# Altium PCB Nucleo Shield.PcbDoc
Units mil, origin at the board's own origin, x right, y up, seen from the top; angles counter-clockwise.
Board outline 6000 x 4000 mil, 2 copper layers (Top Layer, Bottom Layer); 70 components, 61 nets, 296 pads, 0 vias.
Unrouted connection lines stored in the file: 175.
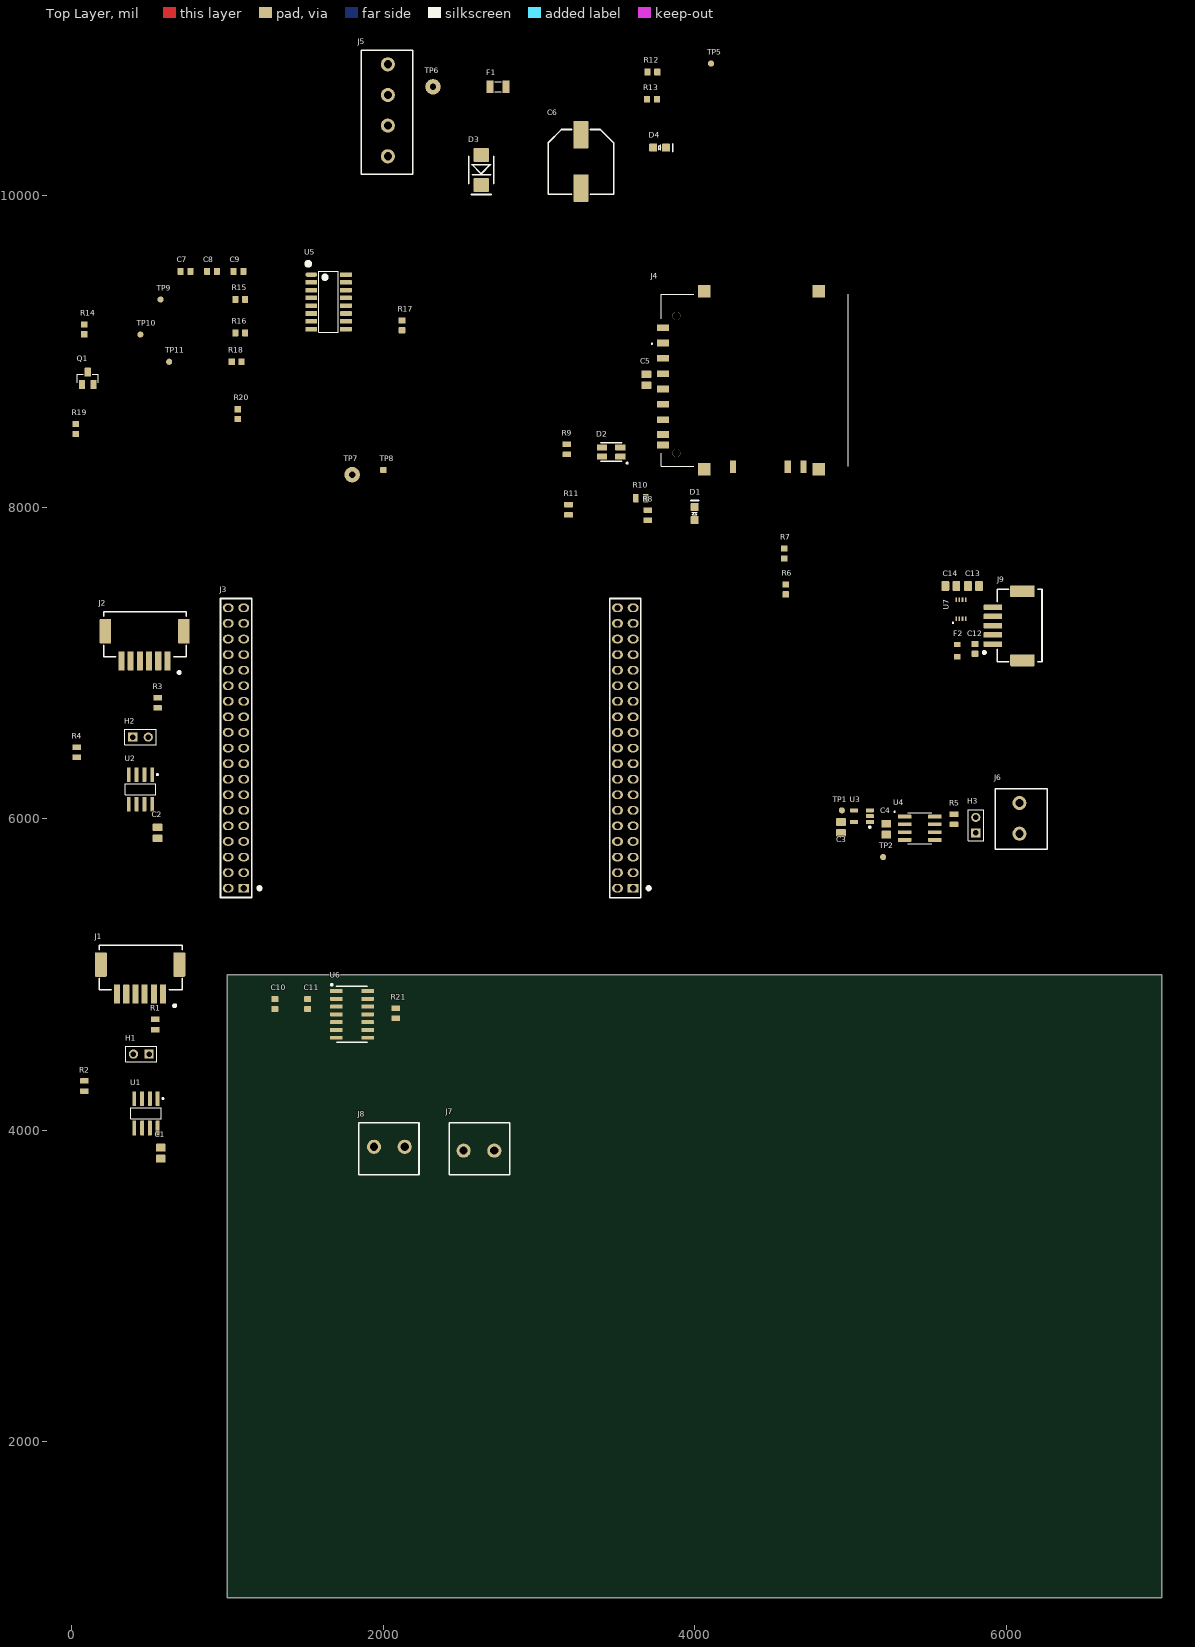
[diagram p0: Top Layer view]
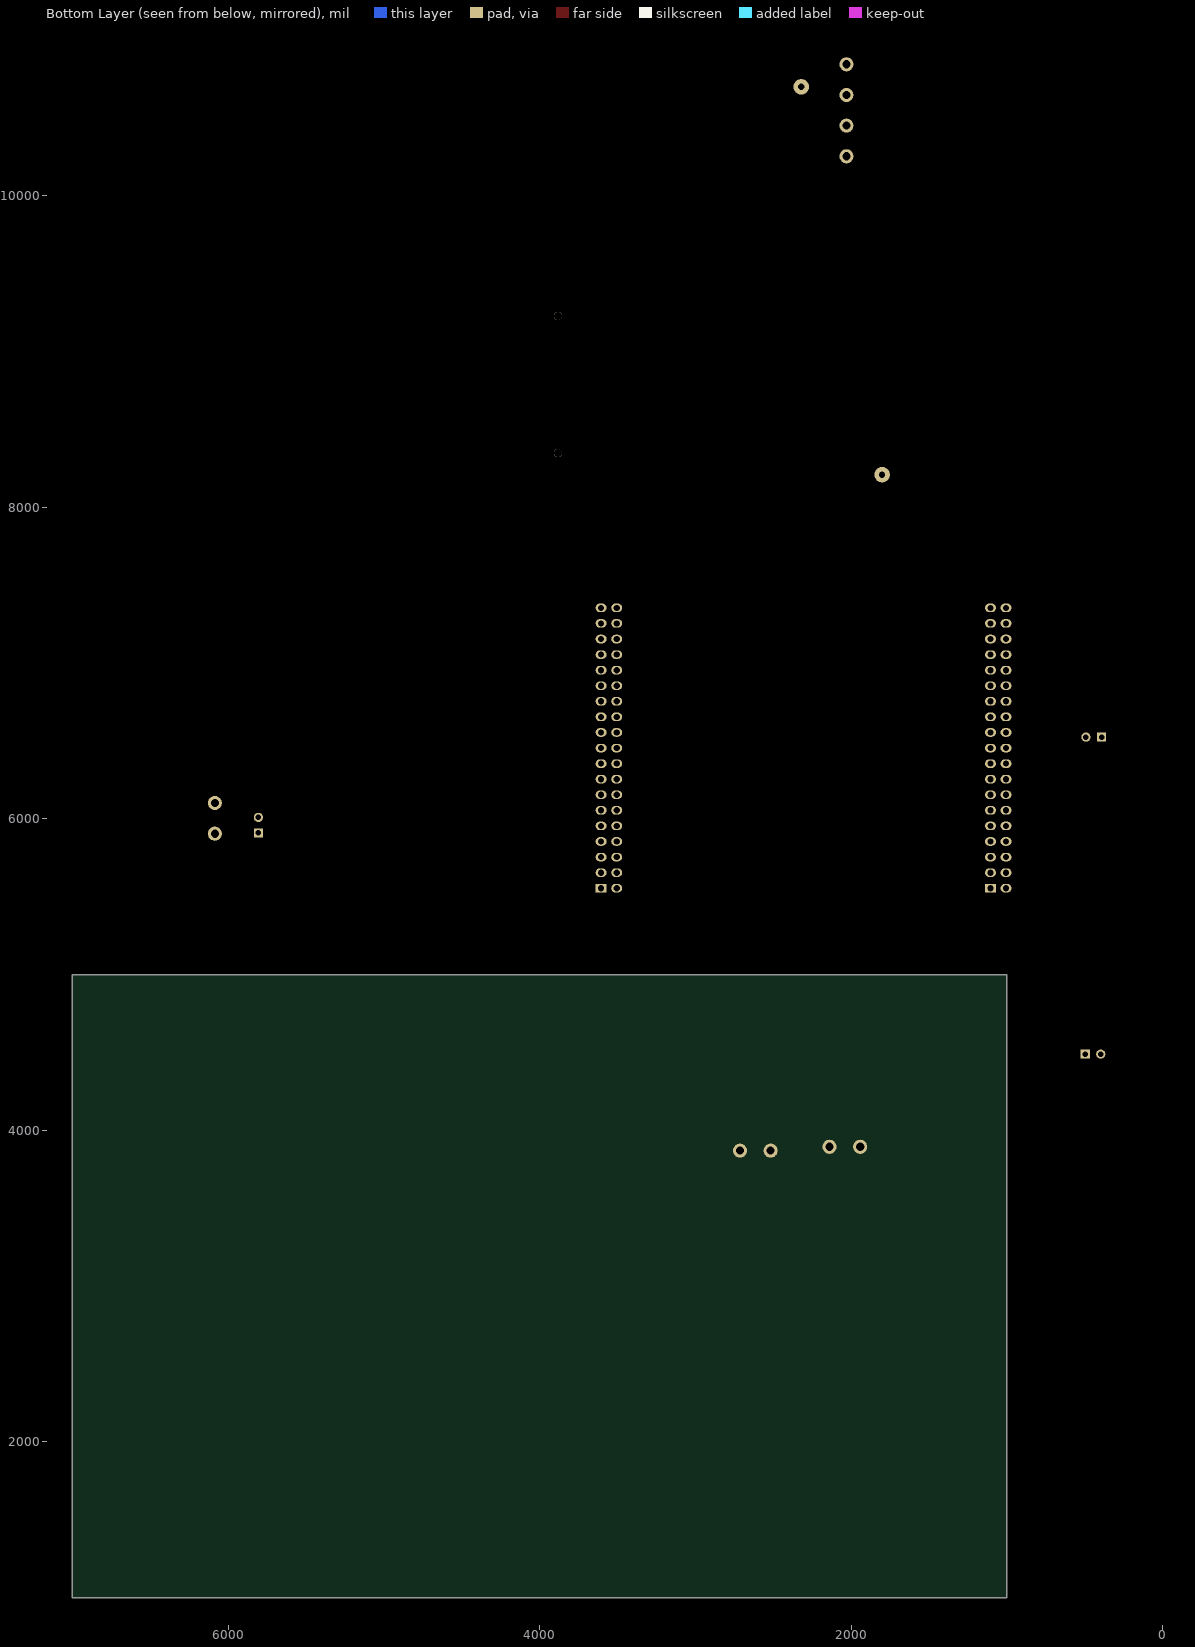
[diagram p1: Bottom Layer view, seen from below]

## Layer stack, top to bottom
Top Solder: solder mask 0.4, Solder Resist, Dk 3.5
Top Layer: signal copper 1.4
Dielectric 1: dielectric 12.6, FR-4, Dk 4.8
Bottom Layer: signal copper 1.4
Bottom Solder: solder mask 0.4, Solder Resist, Dk 3.5

## Board outline
1000,1000 7000,1000 7000,5000 1000,5000

## Design rules (kind name [scope] priority, off if disabled: settings)
Clearance [All] p1: gap=10 ignorepadtopadclearanceinfootprint=FALSE except(0: Arc-Hole Track-Hole SMDPad-Hole THPad-Hole Via-Hole Fill-Hole Poly-Hole Region-Hole Text-Hole)
DiffPairsRouting [All] p1: maxlimit=10 minlimit=10 mostfreqgap=10 toplayer_minwidth=15 toplayer_maxwidth=15 toplayer_prefwidth=15 bottomlayer_minwidth=15 bottomlayer_maxwidth=15 bottomlayer_prefwidth=15 maxuncoupledlength=500
PolygonConnect [All] p1: connectstyle=Relief reliefconductorwidth=10 reliefentries=4 polygonreliefangle="90 Angle" airgapwidth=10
RoutingVias [All] p1: holewidth=28 width=50 viastyle="Through Hole" minholewidth=28 minwidth=50 maxholewidth=28 maxwidth=50
SolderMaskExpansion [All] p1: expansion=4 istentingtop=FALSE
Width [All] p1: maxlimit=10 minlimit=10 preferedwidth=10
29 further rules are at their usual default settings.

## Classes and differential pairs
component class "SH7 - BROADCOM ENCODER": C12 C13 C14 F2 J9 U7
differential pair RS-485: +RS-485_P -RS-485_N
differential pair CANB: +CANB_P -CANB_N
differential pair CANA: +CANA_P -CANA_N
differential pair BISS_A_DATA: +BISS_A_DATA_P -BISS_A_DATA_N
differential pair BISS_A_CLK: +BISS_A_CLK_P -BISS_A_CLK_N

## Components (designator, comment, footprint, x,y, rotation, side; value= is the part's Value field where it differs from the comment)
C1 "CAP_0.1uF_50V_0805" CAP2012 572,3854.76 r270 top value=0.1μF
C2 "CAP_0.1uF_50V_0805" CAP2012 552,5910.24 r90 top value=0.1μF
C3 "CAP_0.1uF_50V_0805" CAP2012 4940,5945.24 r270 top value=0.1μF
C4 "CAP_0.1uF_50V_0805" CAP2012 5230,5934.76 r90 top value=0.1μF
C5 "CAP_0.1uF_50V_0805" CAP2012 3690,8819.76 r270 top value=0.1μF
C6 "CAP_270uF_50V_ALUM" RADIAL_PANASONIC_G 3270,10221.26 r180 top value=270μF
C7 "CAP_0.1uF_50V_0603" CAP0603 731,9515 r0 top value=0.1μF
C8 "CAP_0.1uF_50V_0603" CAP0603 901,9515 r0 top value=0.1μF
C9 "CAP_0.1uF_50V_0603" CAP0603 1071,9515 r0 top value=0.1μF
C10 "CAP_1uF_25V_0603" CAP0603 1305,4811.5 r270 top value=1μF
C11 "CAP_0.1uF_50V_0603" CAP0603 1515,4811.5 r270 top value=0.1μF
C12 "CAP_0.1uF_50V_0603" CAP0603 5800,7091.5 r90 top value=0.1μF
C13 "CAP_0.1uF_50V_0805" CAP2012 5790.24,7495 r180 top value=0.1μF
C14 "CAP_0.1uF_50V_0805" CAP2012 5645.24,7495 r180 top value=0.1μF
D1 "LED_GREEN" LED_0805_GREEN 4000,7961.34 r90 top
D2 "LED_RGB" LED_RGB 3464.06,8355.47 r90 top
D3 "TVS_DIODE_UNIDIR_26V" TVS_DIODE_UNIDIRECTIONAL_SMB 2630,10166.46 r90 top
D4 "LED_GREEN" LED_0805_GREEN 3775,10310 r0 top
F1 "FUSE_5A_1206" FUSE_1206 2737.5,10700 r0 top
F2 "FUSE_250mA_0603" FUSE_0603 5685,7080.43 r270 top
H1 "JUMPER" HDR1X2 497,4490 r180 top
H2 "JUMPER" HDR1X2 392,6525 r0 top
H3 "JUMPER" HDR1X2 5805,5910 r90 top
J1 "CON_6M_SM_RA_1.5mm" MOLEX-5025850670 586.68,4875.24 r0 top
J2 "CON_6M_SM_RA_1.5mm" MOLEX-5025850670 615.11,7015 r0 top
J3 "HEADER_NUCLEO" HEADER_NUCLEO 2305,6455 r180 top
J4 "CON_SD_CARD" HRS_DM1AA-SF-PEJ(21) 4385,8785 r90 top
J5 "CON_4M_TERM" 1935187 2030,10549.72 r90 top
J6 "CON_2POS_SCREW_TERM" 1935161 6085,6003.43 r90 top
J7 "CON_2POS_SCREW_TERM" 1935161 2615,3870 r180 top
J8 "CON_2POS_SCREW_TERM" 1935161 2040,3895 r0 top
J9 "CON_5M_SM_RA" MOLEX-5025850570 5915,7122.83 r270 top
Q1 "NMOS_30V_2.2A" NMOS_SSOT-3 103.4,8829.37 r0 top
R1 "RES_120Ω_0805_1%" RESC0805 537,4680 r270 top value=120Ω
R2 "RES_0Ω_0805" RESC0805 82,4285 r270 top value=0Ω
R3 "RES_120Ω_0805_1%" RESC0805 552,6745 r270 top value=120Ω
R4 "RES_0Ω_0805" RESC0805 32,6427.52 r270 top value=0Ω
R5 "RES_120Ω_0805_1%" RESC0805 5665,5997.52 r270 top value=120Ω
R6 "RES_10kΩ_0603_5%" RESC0603 4585,7442.01 r90 top value=10kΩ
R7 "RES_10kΩ_0603_5%" RESC0603 4575,7672.01 r90 top value=10kΩ
R8 "RES_120Ω_0805_1%" RESC0805 3700,7950 r90 top value=120Ω
R9 "RES_20Ω_0805_1%" RESC0805 3180,8372.52 r90 top value=20Ω
R10 "RES_120Ω_0805_1%" RESC0805 3655,8060 r180 top value=120Ω
R11 "RES_20Ω_0805_1%" RESC0805 3190,7985 r90 top value=20Ω
R12 "RES_1kΩ_0603_5%" RESC0603 3760,10795 r180 top value=1kΩ
R13 "RES_1kΩ_0603_5%" RESC0603 3757.99,10620 r180 top value=1kΩ
R14 "RES_1kΩ_0603_5%" RESC0603 81,9112.01 r90 top value=1kΩ
R15 "RES_1kΩ_0603_5%" RESC0603 1113.99,9335 r180 top value=1kΩ
R16 "RES_1kΩ_0603_5%" RESC0603 1113.99,9120 r180 top value=1kΩ
R17 "RES_1kΩ_0603_5%" RESC0603 2121,9137.01 r90 top value=1kΩ
R18 "RES_1kΩ_0603_5%" RESC0603 1091,8935 r180 top value=1kΩ
R19 "RES_1kΩ_0603_5%" RESC0603 26,8472.01 r90 top value=1kΩ
R20 "RES_1kΩ_0603_5%" RESC0603 1066,8567.01 r90 top value=1kΩ
R21 "RES_120Ω_0805_1%" RESC0805 2080,4752.48 r90 top value=120Ω
TP1 "TESTPOINT_1MM_CIRCLE" TESTPOINT_CIRCLE_1MM 4945,6055 r270 top
TP2 "TESTPOINT_1MM_CIRCLE" TESTPOINT_CIRCLE_1MM 5210,5755 r90 top
TP5 "TESTPOINT_1MM_CIRCLE" TESTPOINT_CIRCLE_1MM 4105,10850 r90 top
TP6 "TESTPOINT_LOOP" TESTPOINT_LOOP 2320,10700 r0 top
TP7 "TESTPOINT_LOOP" TESTPOINT_LOOP 1801,8210 r0 top
TP8 "TESTPOINT_1MM_SQUARE" TESTPOINT_SQUARE_1MM 2001,8240 r90 top
TP9 "TESTPOINT_1MM_CIRCLE" TESTPOINT_CIRCLE_1MM 571,9335 r90 top
TP10 "TESTPOINT_1MM_CIRCLE" TESTPOINT_CIRCLE_1MM 441,9110 r90 top
TP11 "TESTPOINT_1MM_CIRCLE" TESTPOINT_CIRCLE_1MM 626,8935 r90 top
U1 "IC_CAN_TRANSCEIVER" LT-S8_N 477,4110 r270 top
U2 "IC_CAN_TRANSCEIVER" LT-S8_N 442,6190 r270 top
U3 "IC_BUFFER" SN74LV1T34DBVR 5074.65,6017.6 r180 top
U4 "MAX485CSA" SOIC127P600X175-8N 5445,5940 r0 top
U5 "IC_MOTOR_DRIVER_ST" SO-16N 1649.78,9320 r0 top
U6 "MAX3491" MAX3491CSD+T 1800,4745 r0 top
U7 "IC_LVL_SHIFTER_2_CH" TXS0102QDCURQ1 5680.31,7285 r0 top

## Footprints (in the part's own frame and the unit in brackets; to place one, negate y for a bottom-side part, rotate by r counter-clockwise, add the part's x,y. Pads: shape width x height; smd on the part's side, far side on the other; paste and mask are expansions set on the pad)
1935161 [mm] "TERM BLK 2POS SIDE ENTRY 5MM PCB"
  round 2.3 hole 1.325: 1(-2.5,0) 2(2.5,0)
  silkscreen extent -5.01,-4.57 4.83,3.94, body extent -5.01,-5.06 5.39,3.94, height 11.41
1935187 [mm]
  round 2.3 hole 1.325: 1(-7.5,0) 2(-2.5,0) 3(2.5,0) 4(7.5,0)
  silkscreen extent -10.41,-4.06 9.78,4.32, body extent -10.79,-4.06 9.78,4.94, height 11.41
CAP0603 [mm]
  rrect20% 1x1.1 smd: 1(-0.8,0) 2(0.8,0)
  body extent -0.87,-0.48 0.88,0.48, height 0.87
CAP2012 [mm]
  rrect20% 1.25x1.6 smd: 1(-0.895,0) 2(0.895,0)
  body extent -1.1,-0.7 1.1,0.75, height 1.41
FUSE_0603 [mm] "Chip Fuse, Body 1.6x0.81mm"
  rrect15% 0.85x1.09 smd: 1(-1.005,0) 2(1.005,0)
  body extent -0.8,-0.38 0.8,0.38, height 0.75
FUSE_1206 [mil]
  rect 45x80 smd mask+1: 1(-52.5,0) 2(52.5,0)
  silkscreen extent -20,-32 20,32, body extent -65,-32 65,32, height 32
HDR1X2 [mm] "Connector; Header; 2 Position"
  rect 1.5x1.5 hole 0.9: 1(0,0)
  round 1.5 hole 0.9: 2(2.54,0)
  silkscreen extent -1.27,-1.27 3.81,1.27, body extent -1.27,-1.27 3.81,1.27, height 6.35
HEADER_NUCLEO [mil] "Nucleo board's header"
  rect 70x55 hole 40: 1(-1300,900) 39(1200,900)
  oval 70x55 hole 40: 2(-1200,900) 3(-1300,800) 4(-1200,800) 5(-1300,700) 6(-1200,700) 7(-1300,600) 8(-1200,600) 9(-1300,500) 10(-1200,500) 11(-1300,400) 12(-1200,400) 13(-1300,300) 14(-1200,300) 15(-1300,200) 16(-1200,200) 17(-1300,100) 18(-1200,100) 19(-1300,0) 20(-1200,0) 21(-1300,-100) 22(-1200,-100) 23(-1300,-200) 24(-1200,-200) 25(-1300,-300) 26(-1200,-300) 27(-1300,-400) 28(-1200,-400) 29(-1300,-500) 30(-1200,-500) 31(-1300,-600) 32(-1200,-600) 33(-1300,-700) 34(-1200,-700) 35(-1300,-800) 36(-1200,-800) 37(-1300,-900) 38(-1200,-900) 40(1300,900) 41(1200,800) 42(1300,800) 43(1200,700) 44(1300,700) 45(1200,600) 46(1300,600) 47(1200,500) 48(1300,500) 49(1200,400) 50(1300,400) 51(1200,300) 52(1300,300) 53(1200,200) 54(1300,200) 55(1200,100) 56(1300,100) 57(1200,0) 58(1300,0) 59(1200,-100) 60(1300,-100) 61(1200,-200) 62(1300,-200) 63(1200,-300) 64(1300,-300) 65(1200,-400) 66(1300,-400) 67(1200,-500) 68(1300,-500) 69(1200,-600) 70(1300,-600) 71(1200,-700) 72(1300,-700) 73(1200,-800) 74(1300,-800) 75(1200,-900) 76(1300,-900)
  silkscreen extent -1410,-960 1349,960, body extent -1350,-960 1350,960, height 335
HRS_DM1AA-SF-PEJ(21) [mm]
  rect 1.1x2 smd: 1(6.875,14.95) 2(4.375,14.95) 3(1.875,14.95) 4(-0.625,14.95) 5(-3.125,14.95) 6(-5.625,14.95) 7(-8.05,14.95) 8(-9.75,14.95) 9(9.375,14.95)
  rect 2x1 smd: 10(-13.3,3.55) 11(-13.3,-5.4) 12(-13.3,-8)
  rect 2x2 smd: 13(-13.7,8.2) 14(-13.7,-10.45) 15(15.3,-10.45) 16(15.3,8.2)
  round 1.3 hole 1.3 unplated: ""(-11.1,12.75) ""(11.3,12.75)
  silkscreen extent -13.2,-15.25 14.8,16.85, body extent -14.2,-15.25 15.8,15.25, height 2.9
LED_0805_GREEN [mm] "SMD, 2-Leads, Body 2x1.25mm"
  rrect20% 1.3x1.3 smd: 1(-1.05,0) 2(1.05,0)
  silkscreen extent -0.18,-0.63 2.11,0.64, body extent -1,-0.62 1,0.63, height 1.12
LED_RGB [mm]
  rrect20% 1x1.7 smd: 1(-0.75,-1.5) 2(-0.75,1.5) 3(0.75,1.5) 4(0.75,-1.5)
  silkscreen extent -1.92,-2.73 1.53,1.7, body extent -1.4,-1.75 1.4,1.75, height 1.89
LT-S8_N [mm] "SOP, 8-Leads, Body 4.9x3.9mm, Pitch 1.27mm, IPC Medium Density"
  rrect20% 2.375x0.625 smd: 1(-2.4,1.905) 2(-2.4,0.635) 3(-2.4,-0.635) 4(-2.4,-1.905) 5(2.4,-1.905) 6(2.4,-0.635) 7(2.4,0.635) 8(2.4,1.905)
  silkscreen extent -2.52,-2.5 0.9,2.88, body extent -2.91,-2.4 2.87,2.5, height 1.45
MAX3491CSD+T [mil] "RS-422/485 Transceiver footprint (14-SOIC)"
  rrect15% 80x25 smd: 1(-100,150) 2(-100,100) 3(-100,50) 4(-100,0) 5(-100,-50) 6(-100,-100) 7(-100,-150) 8(100,-150) 9(100,-100) 10(100,-50) 11(100,0) 12(100,50) 13(100,100) 14(100,150)
  silkscreen extent -135,-180 98,195, body extent -120,-173 117,173, height 67
MOLEX-5025850570 [mm]
  rrect15% 1.9x4 smd: 0(-8.625,4.82) 0(2.675,4.82)
  rrect15% 0.9x3 smd: 1(0,0) 2(-1.5,0) 3(-3,0) 4(-4.5,0) 5(-6,0)
  silkscreen extent -8.9,-1.6 2.9,8, body extent -8.9,-0.5 2.9,8, height 6.21
MOLEX-5025850670 [mm]
  rrect15% 1.9x4 smd: 0(-10.125,4.82) 0(2.675,4.82)
  rrect15% 1x3.1 smd: 1(0,0) 2(-1.5,0) 3(-3,0) 4(-4.5,0) 5(-6,0) 6(-7.5,0)
  silkscreen extent -10.4,-2.1 3.1,8, body extent -10.25,-0.62 3.05,7.88, height 6.41
NMOS_SSOT-3 [mm] "FDN337N"
  rrect20% 1x1.5 smd: 1(-0.95,-1) 2(0.95,-1) 3(0,1)
  silkscreen extent -1.7,-0.75 1.7,0.66, body extent -1.46,-1.41 1.46,1.1, height 1.12
RADIAL_PANASONIC_G [mm] "Size G radial surface mount capacitor"
  rrect15% 2.5x4.5 smd: 1(0,-4.35) 2(0,4.35)
  silkscreen extent -5.33,-5.21 5.33,5.33, body extent -5.15,-5.8 5.15,5.8, height 10.21
RESC0603 [mm] "Chip Resistor, Body 1.6x0.8mm, IPC Medium Density"
  rrect15% 1x1.1 smd: 1(0,0) 2(1.6,0)
  body extent 0,-0.4 1.6,0.4, height 0.46
RESC0805 [mm] "Chip Resistor, 2-Leads, Body 2.00x1.25mm, IPC High Density"
  rrect15% 0.9x1.4 smd: 1(-0.825,0) 2(0.825,0)
  body extent -1,-0.62 1,0.63, height 0.61
SN74LV1T34DBVR [mm] "SOT-23-5, Unidirectional level shifter"
  rrect15% 1.3x0.63 smd mask+0.05: 1(-1.279,0.95) 2(-1.279,0) 3(-1.279,-0.95) 4(1.279,-0.95) 5(1.279,0.95)
  silkscreen extent -1.42,1.64 -1.14,1.92, body extent -1.4,-1.45 1.4,1.45, height 1.2
SO-16N [mm]
  oval 1.9x0.75 smd: 1(-2.825,4.445)
  rrect15% 1.9x0.75 smd: 2(-2.825,3.175) 3(-2.825,1.905) 4(-2.825,0.635) 5(-2.825,-0.635) 6(-2.825,-1.905) 7(-2.825,-3.175) 8(-2.825,-4.445) 9(2.825,-4.445) 10(2.825,-3.175) 11(2.825,-1.905) 12(2.825,-0.635) 13(2.825,0.635) 14(2.825,1.905) 15(2.825,3.175) 16(2.825,4.445)
  silkscreen extent -3.45,-5 1.6,6.32, body extent -3,-5 3,5, height 1.75
SOIC127P600X175-8N [mm]
  rrect15% 2.2x0.6 smd: 1(-2.475,1.905) 2(-2.475,0.635) 3(-2.475,-0.635) 4(-2.475,-1.905) 5(2.475,-1.905) 6(2.475,-0.635) 7(2.475,0.635) 8(2.475,1.905)
  silkscreen extent -4.2,-2.51 1.95,2.8, body extent -3,-2.45 3,2.45, height 1.75
TESTPOINT_CIRCLE_1MM [mm]
  round 1 smd: 1(0,0)
TESTPOINT_LOOP [mm]
  round 2.54 hole 1.02: 1(0,0)
  body extent -1.27,-1.27 1.27,1.27, height 4.57
TESTPOINT_SQUARE_1MM [mm]
  rrect20% 1x1 smd: 1(0,0)
TVS_DIODE_UNIDIRECTIONAL_SMB [mm] "SMBJ26A"
  rrect15% 2.3x2.5 smd: 1(-2.45,0) 2(2.45,0)
  silkscreen extent -4,-2.03 2.25,2.03, body extent -2.7,-1.8 2.7,1.8, height 2.27
TXS0102QDCURQ1 [mm]
  rect 0.25x0.75 smd: 1(0,0) 2(0.5,0) 3(1,0) 4(1.5,0) 5(1.5,3.1) 6(1,3.1) 7(0.5,3.1) 8(0,3.1)
  silkscreen extent -0.66,-0.76 -0.46,-0.56, body extent -0.29,0.1 1.81,3.2, height 0.9

## Part data
C1 C2 C3 C4 C5 C13 C14: "CAP CER 0.1UF 50V X7R 0805", Dielectric=X7R, LCSC Part #=C49678, Manufacturer 1="Murata Electronics", Manufacturer Part Number 1=GCM21BR71H104KA37K, Package/Footprint=0805, Supplier Part Number 1=490-8049-1-ND, Voltage Rating=50V, Mounting Type=SMD, Supplier 1=Digi-Key
C6: "CAP ALUM 270uF 50VDC 20% SMD", Manufacturer 1="Panasonic Electronic Components", Manufacturer Part Number 1=EEE-FN1H271UP, Package/Footprint=SMD, Supplier Part Number 1=10-EEE-FN1H271UPCT-ND, Voltage Rating=50V, Mounting Type=SMD, Supplier 1=Digi-Key
C7 C8 C9 C11 C12: "CAP CER 0.1UF 50V X7R 0603", Dielectric=X7R, Manufacturer 1=Yageo, Manufacturer Part Number 1=CC0603KRX7R9BB104, Package/Footprint=0603, Supplier Part Number 1=311-1344-1-ND, Voltage Rating=50V, Mounting Type=SMD, Supplier 1=Digi-Key
C10: "CAP CER 1UF 25V X5R 0603", Dielectric=X5R, Manufacturer 1=Samsung, Manufacturer Part Number 1=CL10A105KA8NNNC, Package/Footprint=0603, Supplier Part Number 1=1276-1102-1-ND, Voltage Rating=25V, Mounting Type=SMD, Supplier 1=Digi-Key
D1 D4: "LED GREEN DIFFUSED 0805 SMD", Forward Voltage Drop=2.2V, Manufacturer 1=OSRAM, Manufacturer Part Number 1="LG R971-KN-1", Package/Footprint=0805, Supplier Part Number 1=475-1410-1-ND, Mounting Type=SMD, Supplier 1=Digi-Key
D2: "LED RGB DIFFUSED 4PLCC SMD", Color=Blue,Green,Red, Forward Voltage=3.1V, Lens Color=White, Manufacturer 1=Broadcom, Manufacturer Part Number 1=ASMB-MTB1-0A3A2, Package/Footprint=4-PLCC, Supplier Part Number 1=516-3280-1-ND, Test Current=20mA, Dominant Wavelength=470nm, Lens Style=Round, Lens Transparency=Diffused, Luminous Intensity=350mcd, Mounting Type=SMD, Number of Pins=4, Supplier 1=Digi-Key, Viewing Angle=115°
D3: "TVS DIODE 26V 42.1V SMB", Manufacturer 1=Littelfuse, Manufacturer Part Number 1=SMBJ26A, Package/Footprint=SMB, Supplier Part Number 1=SMBJ26ALFCT-ND, Mounting Type=SMD, Supplier 1=Digi-Key, Verified=No
F1: "FUSE BOARD MNT 5A 32VAC/VDC 1206", Current Rating=5A, Manufacturer 1=Littelfuse, Manufacturer Part Number 1=0466005.NRHF, Package/Footprint=1206, Supplier Part Number 1=F6019CT-ND, Mounting Type=SMD, Supplier 1=Digi-Key
F2: "FUSE SMD 250mA 32V", Current Rating=250mA, Manufacturer 1=Littelfuse, Manufacturer Part Number 1=0467.250NRHF, Package/Footprint=0603, Supplier Part Number 1=F6020CT-ND, Voltage Rating (DC)=32V, Mounting Type=SMD, Supplier 1=Digi-Key
H1 H2 H3: "HEADER 2X1", Manufacturer 1="TE Connectivity", Manufacturer Part Number 1=87220-2, Package/Footprint=TH, Supplier Part Number 1=A26542-ND, Mounting Type=TH, Supplier 1=Digi-Key
J1 J2: "CONN HEADER SMD RIGHT ANGLE 1.5 MM PITCH", Package/Footprint=SMD, Supplier Part Number 1=WM12832CT-ND, Family=CLIK-Mate, Mounting Type=SMD, Supplier 1=Digi-Key
J3: "CONN HDR 38POS 0.1 GOLD PCB", Manufacturer 1=Sullins, Manufacturer Part Number 1=PPPC192LFBN-RC, Package/Footprint=TH, Supplier Part Number 1=S7122-ND, Mounting Type=TH, Supplier 1=Digi-Key, Verified=No
J4: "CONN SD CARD PUSH-PUSH R/A SMD", Manufacturer 1="Hirose Electric Co Ltd", Manufacturer Part Number 1=DM1AA-SF-PEJ(21), Supplier Part Number 1=HR845CT-ND, Supplier 1=Digi-Key
J5: "TERM BLK 4POS SIDE ENTRY 5MM PCB", Manufacturer 1="Phoenix Contact", Manufacturer Part Number 1=1935187, Package/Footprint=TH, Supplier Part Number 1=277-1579-ND, Mounting Type=TH, Pitch=5mm, Screw Thread=M2.6, Supplier 1=Digi-Key, Wire Gauge=12-26AWG
J6 J7 J8: "TERM BLK 2POS SIDE ENTRY 5MM", Manufacturer 1="Phoenix Contact", Manufacturer Part Number 1=1935161, Package/Footprint=SMD, Supplier Part Number 1=277-1667-ND, Mounting Type=TH, Supplier 1=Digi-Key
J9: "CONN HEADER SMD RIGHT ANGLE 1.5MM PITCH", Current Rating=2A, Manufacturer 1=Molex, Manufacturer Part Number 1=5025850570, Package/Footprint=SMD, Supplier Part Number 1=WM14469CT-ND, Family=CLIK-Mate, Mounting Type=SMD, Orientation="Right Angle", Supplier 1=Digi-Key
Q1: "MOSFET N-CH 30V 2.2A SUPERSOT3", Manufacturer 1="ON Semiconductor / Fairchild", Manufacturer Part Number 1=FDN337N, Package/Footprint=SuperSOT-3, Supplier Part Number 1=FDN337NCT-ND, Id=2.2A, Mounting Type=SMD, Supplier 1=Digi-Key, Vdss=30V, Verified=No, Vgs (Max)=±8V
R1 R3 R5 R8 R10 R21: "RES 120 OHM 1% 1/8W 0805", LCSC Part #=C17437, Manufacturer 1=Vishay, Manufacturer Part Number 1=CRCW0805120RFKEA, Package/Footprint=0805, Supplier Part Number 1=541-120CCT-ND, Mounting Type=SMD, Supplier 1=Digi-Key
R2 R4: "RES 0 OHM JUMPER 1/8W 0805", LCSC Part #=C17477, Manufacturer 1="Panasonic Electronic Components", Manufacturer Part Number 1=ERJ-6GEY0R00V, Package/Footprint=0805, Supplier Part Number 1=P0.0ACT-ND, Mounting Type=SMD, Supplier 1=Digi-Key
R6 R7: "RES 10K OHM 5% 1/10W 0603", Manufacturer 1=Yageo, Manufacturer Part Number 1=RC0603JR-0710KL, Package/Footprint=0603, Supplier Part Number 1=311-10KGRCT-ND, Mounting Type=SMD, Supplier 1=Digi-Key
R9 R11: "RES 20 OHM 1% 1/8W 0805", LCSC Part #=C17581, Manufacturer 1=Yageo, Manufacturer Part Number 1=RC0805FR-0720RL, Package/Footprint=0805, Supplier Part Number 1=311-20.0CRCT-ND, Mounting Type=SMD, Supplier 1=Digi-Key
R12 R13 R14 R15 R16 R17 R18 R19 R20: "RES 1K OHM 5% 1/10W 0603", Manufacturer 1=Yageo, Manufacturer Part Number 1=RC0603JR-071KL, Package/Footprint=0603, Supplier Part Number 1=311-1.0KGRCT-ND, Mounting Type=SMD, Supplier 1=Digi-Key
TP1 TP2 TP5 TP9 TP10 TP11: "TESTPOINT 1MM CIRCLE"
TP6 TP7: "TESTPOINT THRUHOLE", Manufacturer 1="Keystone Electronics", Manufacturer Part Number 1=5002, Package/Footprint=TH, Supplier Part Number 1=36-5002-ND, Mounting Type=TH, Supplier 1=Digi-Key
TP8: "TESTPOINT 1MM SQUARE"
U1 U2: "IC TXRX CAN 4MBPS 8SO", LCSC Part #=C117076, Manufacturer 1="Linear Technologies", Manufacturer Part Number 1=LTC2875IS8#PBF, Package/Footprint=8-SOIC, Supplier Part Number 1=LTC2875IS8#PBF-ND, Mounting Type=SMD, Supplier 1=Digi-Key
U3: "IC BUF NON-INVERT 5.5V SOT23-5", LCSC Part #=C100024, Manufacturer 1="Texas Instruments", Manufacturer Part Number 1=SN74LV1T34DBVR, Package/Footprint=SOT-23-5, Supplier Part Number 1=296-37176-1-ND, Mounting Type=SMD, Supplier 1=Digi-Key
U4: "IC RS485 TRANSCEIVER HALF 1/1 8SOIC", LCSC Part #=C9945, Manufacturer 1="Maxim Integrated", Manufacturer Part Number 1=MAX485CSA+T, Package/Footprint=8-SOIC, Supplier Part Number 1=MAX485CSA+TCT-ND, Supply Voltage="4.75V - 5.25V", Data Rate=2.5Mbps, Mounting Type=SMD, Protocol="RS422, RS485", Supplier 1=Digi-Key
U5: "IC MOTOR DRIVER 4V-28V 16SOIC", Manufacturer 1=STMicroelectronics, Manufacturer Part Number 1=VNH7070ASTR, Output Current=15A, Package/Footprint=16-SOIC, Supplier Part Number 1=497-17630-1-ND, Mounting Type=SMD, Supplier 1=Digi-Key, Verified=Yes
U6: "IC RS485 TRANSCEIVER FULL 1/1 14SOIC", Manufacturer 1=Maxim, Manufacturer Part Number 1=MAX3491CSD+T, Package/Footprint=14-SOIC, Supplier Part Number 1=MAX3491CSD+CT-ND, Mounting Type=SMD, Supplier 1=Digi-Key
U7: "IC TRNSLTR BIDIRECTIONAL US8", Manufacturer 1="Texas Instruments", Manufacturer Part Number 1=TXS0102QDCURQ1, Max Operating Temperature=125°C, Max Supply Voltage=4.6V, Min Operating Temperature=-40°C, Min Supply Voltage=-0.5V, Package Body Material=Plastic, Package Code=VSSOP, Package Shape=Rectangular, Package Style="SMALL OUTLINE, VERY THIN PROFILE, SHRINK PITCHMeter", Peak Reflow Temperature (Cel)=260°C, Supplier Part Number 1=296-37938-1-ND, Supply Voltage-Nom=3.3V, Temperature Grade=AUTOMOTIVE, Category="Interface ICs", ComponentLink1Description=https://www.ti.com:443/lit/ds/symlink/txs0102-q1.pdf?src-supplier=IHS+Markit, ComponentLink1URL=https://www.ti.com:443/lit/ds/symlink/txs0102-q1.pdf?src-supplier=IHS+Markit, ComponentLink2Description=https://datasheet.ciiva.com/48438/txs0102-q1-48438266.pdf?src-supplier=Avnet, ComponentLink2URL=https://datasheet.ciiva.com/48438/txs0102-q1-48438266.pdf?src-supplier=Avnet, Height - Seated (Max)=0.9mm, Interface IC Type="INTERFACE CIRCUIT", JESD-30 Code=R-PDSO-G8, JESD-609 Code=e4, Length=2.3mm, Moisture Sensitivity Level=2, Number of Functions=1, Number of Pins=8, Pricing 1="1=0.82000, 10=0.71900, 25=0.67600, 100=0.55150, 250=0.51232, 500=0.43600, 1000=0.34880 (USD)", RoHS=Yes, Stock 1=25079, Supplier 1=Digi-Key, Surface Mount=Yes, Terminal Finish=Nickel, Terminal Form="Gull Wing", Terminal Pitch=0.5mm, Terminal Position=DUAL, Width=2mm

## Nets (pads, with @x,y where several pads share a name; then routed paths per layer and width w, separated by ;. In a path a pad name is that pad's centre, name@x,y a point inside that pad or via, vN(x,y) a via of type N, cw(c..) or ccw(c..) an arc to the next point about the centre after c; other vN are vias at no path point)
3V3: C1.1 C2.1 C3.1 C5.2 C10.2 C11.2 C13.2 D2.4 J3.12 J3.16 J4.4 R6.2 R7.2 U1.3 U2.3 U3.5 U6.4 U6.13 U6.14 U7.3 U7.6
5V: C4.1 C14.1 F2.2 J3.18 J3.46 U4.3 U4.8 U7.7
BISS_A_CLK_N: J8.2 U6.10
BISS_A_CLK_P: J8.1 U6.9
BISS_A_DATA_N: J7.2 R21.1 U6.11
BISS_A_DATA_P: J7.1 R21.2 U6.12
CANA_N: H1.2 J1.1 J1.5 U1.6
CANA_P: J1.2 J1.4 R1.1 U1.7
CANB_N: H2.2 J2.1 J2.5 U2.6
CANB_P: J2.2 J2.4 R3.1 U2.7
GND: C1.2 C2.2 C3.2 C4.2 C5.1 C6.2 C7.1 C8.1 C10.1 C11.1 C12.1 C13.1 C14.2 D1.2 D3.2 D4.2 J1.0 J1.3 J1.6 J2.0 J2.3 J2.6 J3.8 J3.19 J3.20 J3.22 J3.47 J3.58 J4.3 J4.6 J4.12 J4.13 J5.1 J9.0 J9.3 Q1.2 R2.1 R4.1 R17.1 R19.1 R20.1 TP7.1 TP8.1 U1.2 U2.2 U3.3 U4.2 U4.5 U5.1 U5.8 U5.9 U5.16 U6.3 U6.6 U6.7 U7.2
MOTOR_DIR: J3.67 Q1.1 R15.1 R19.2 TP9.1
MOTOR_PWM: J3.55 R18.1 TP11.1
NetC12_2: C12.2 F2.1 J9.1
NetD1_1: D1.1 R8.2
NetD2_1: D2.1 R10.2
NetD2_2: D2.2 R11.1
NetD2_3: D2.3 R9.1
NetD4_1: D4.1 R13.1
NetH1_1: H1.1 R1.2
NetH2_1: H2.1 R3.2
NetH3_2: H3.2 R5.2
NetJ3_1: J3.1 U7.8
NetJ3_2: J3.2 J9.5
NetJ3_21: J3.21 R10.1
NetJ3_25: J3.25 R8.1
NetJ3_28: J3.28 TP1.1 U3.4
NetJ3_30: J3.30 TP2.1 U4.4
NetJ3_35: J3.35 J4.7
NetJ3_36: J3.36 J4.2
NetJ3_37: J3.37 J4.1
NetJ3_38: J3.38 U7.1
NetJ3_41: J3.41 R11.2
NetJ3_43: J3.43 R9.2
NetJ3_49: J3.49 U6.5
NetJ3_50: J3.50 U1.1
NetJ3_51: J3.51 U6.2
NetJ3_52: J3.52 U1.4
NetJ3_54: J3.54 U2.4
NetJ3_63: J3.63 J4.5
NetJ3_68: J3.68 U2.1
NetJ4_10: J4.10 R7.1
NetJ4_11: J4.11 R6.1
NetJ9_2: J9.2 U7.4
NetJ9_4: J9.4 U7.5
NetR2_2: R2.2 U1.8
NetR4_2: R4.2 U2.8
NetR12_1: R12.1 R13.2
NetR15_2: R15.2 U5.3
NetR16_2: R16.2 U5.6
NetR17_2: R17.2 U5.13
NetR18_2: R18.2 U5.11
NetR20_2: R20.2 U5.14
NetU3_2: U3.2 U4.1
nMOTOR_DIR: Q1.3 R14.1 R16.1 TP10.1
OUTA: J5.4 U5.2 U5.15
OUTB: J5.3 U5.7 U5.10
RS-485_N: J6.2 R5.1 U4.7
RS-485_P: H3.1 J6.1 U4.6
VBAT: F1.1 J5.2 TP6.1
VBAT_FUSED: C6.1 C9.1 D3.1 F1.2 R12.2 R14.2 TP5.1 U5.4 U5.5 U5.12
pads on no net: C7.2 C8.2 C9.2 J3.3 J3.4 J3.5 J3.6 J3.7 J3.9 J3.10 J3.11 J3.13 J3.14 J3.15 J3.17 J3.23 J3.24 J3.26 J3.27 J3.29 J3.31 J3.32 J3.33 J3.34 J3.39 J3.40 J3.42 J3.44 J3.45 J3.48 J3.53 J3.56 J3.57 J3.59 J3.60 J3.61 J3.62 J3.64 J3.65 J3.66 J3.69 J3.70 J3.71 J3.72 J3.73 J3.74 J3.75 J3.76 J4. J4.8 J4.9 J4.14 J4.15 J4.16 U1.5 U2.5 U3.1 U6.1 U6.8